# Altium PCB boost_converter.PcbDoc
Units mil, origin at the board's own origin, x right, y up, seen from the top; angles counter-clockwise.
Board outline 4000 x 3000 mil, 2 copper layers (Top Layer, Bottom Layer); 67 components, 32 nets, 157 pads, 0 vias.
Unrouted connection lines stored in the file: 1.
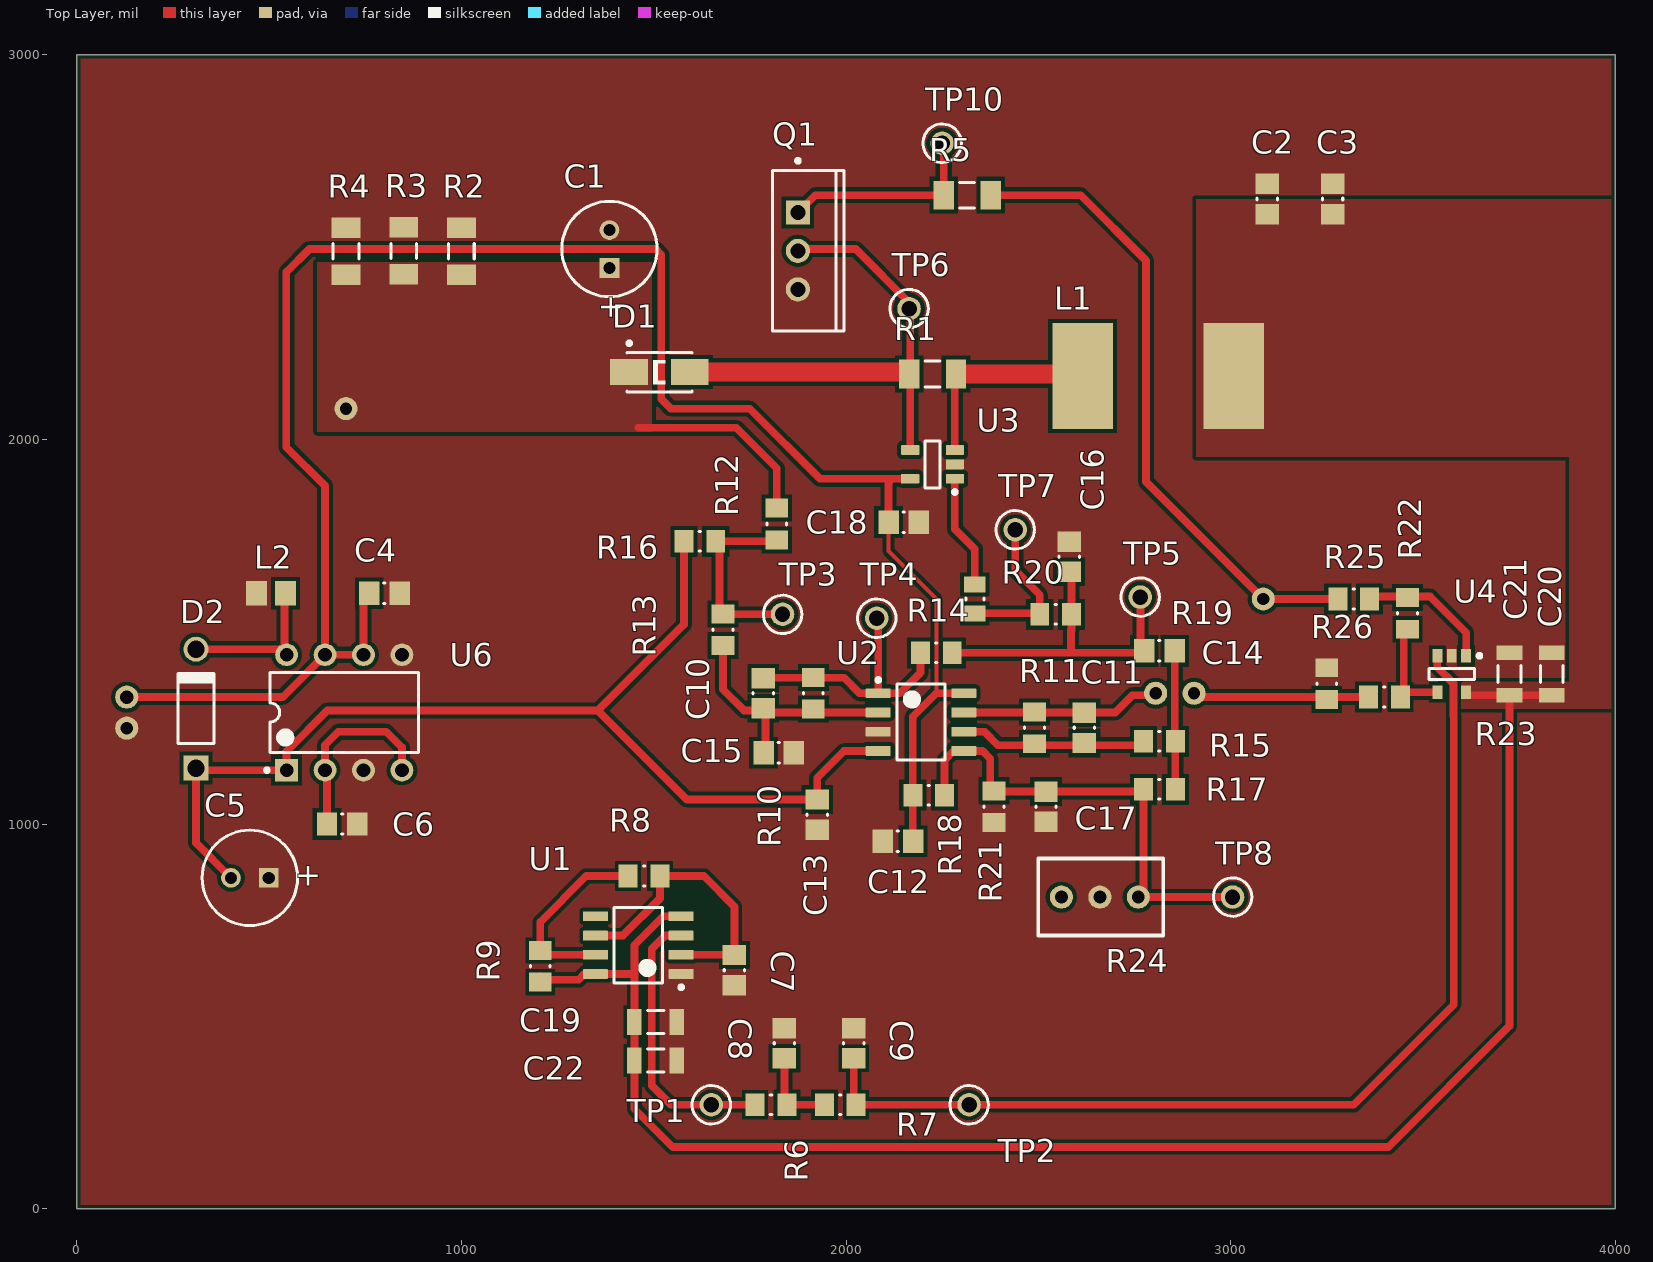
[diagram p0: Top Layer view]
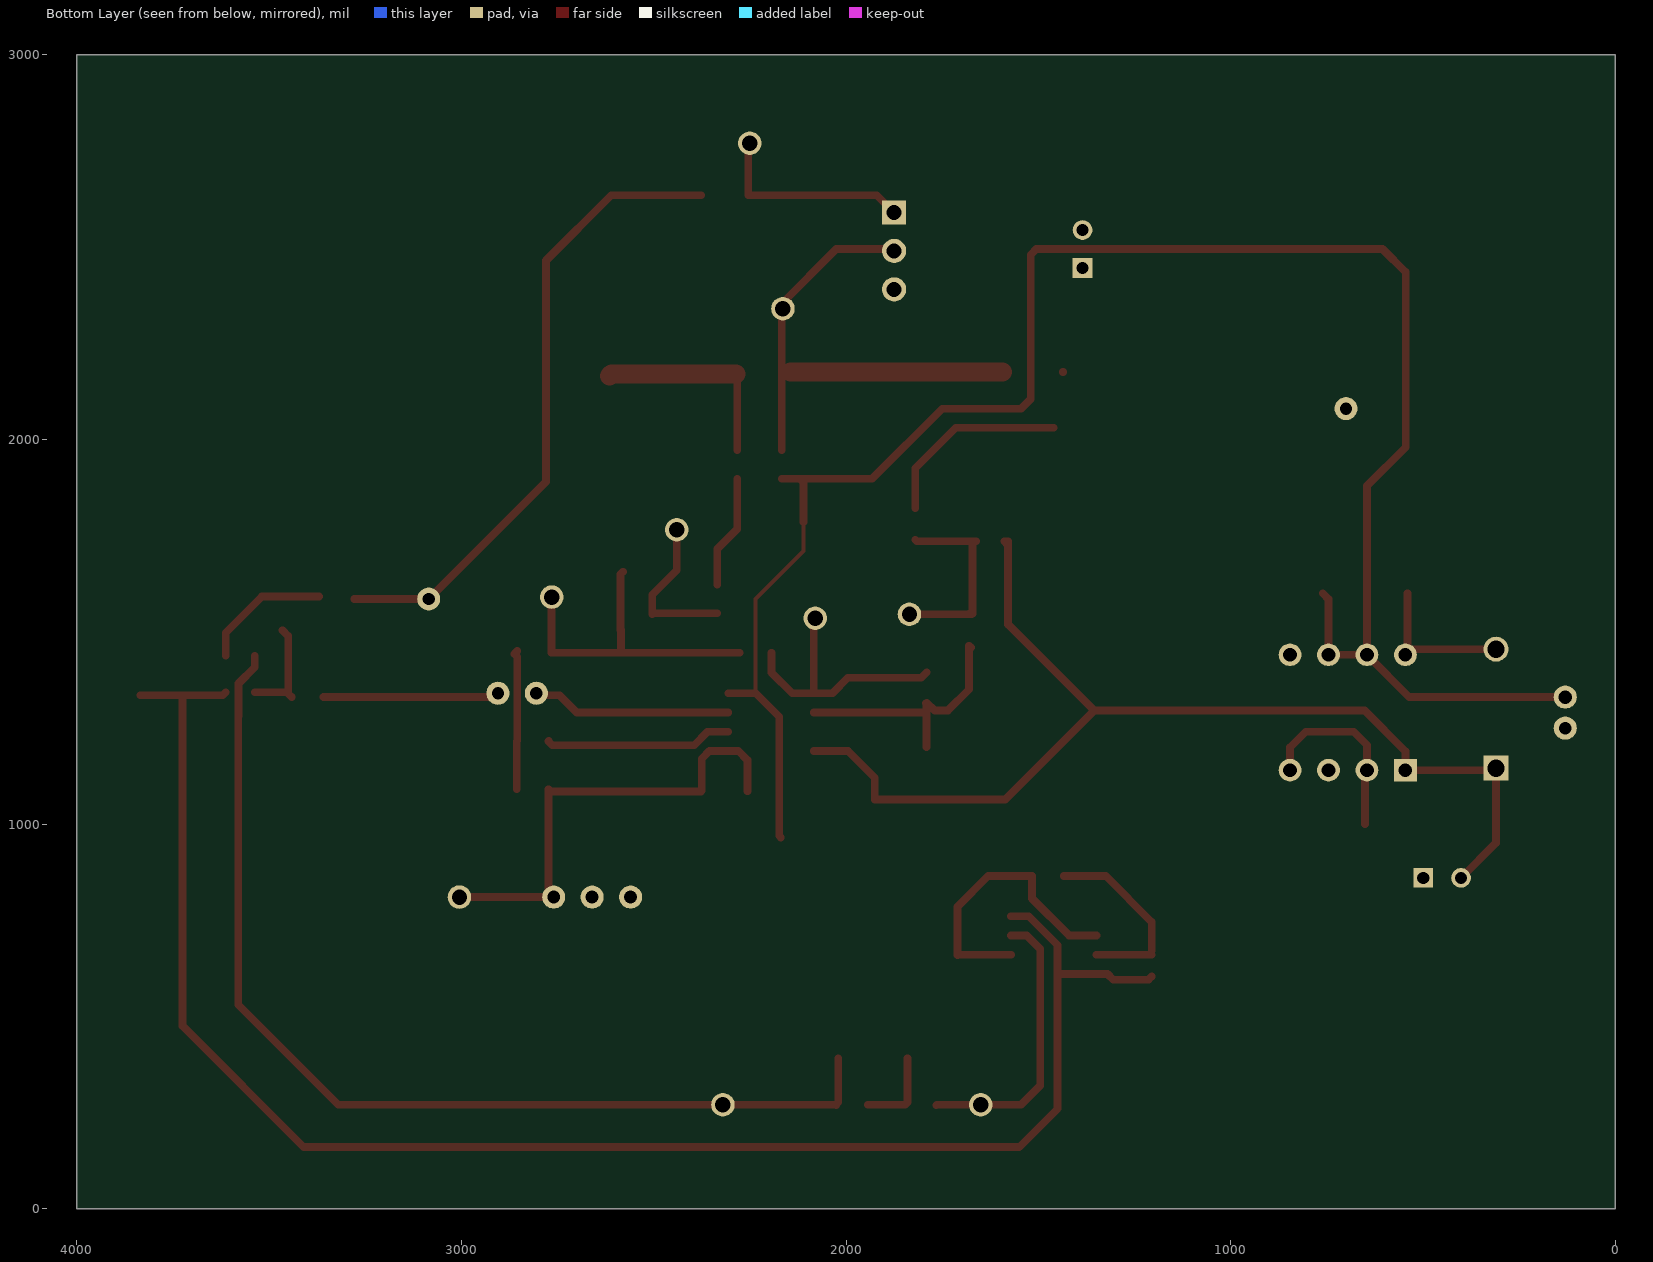
[diagram p1: Bottom Layer view, seen from below]

## Layer stack, top to bottom
Top Solder: solder mask 0.4, Solder Resist, Dk 3.5
Top Layer: signal copper 1.4
Dielectric 1: dielectric 12.6, FR-4, Dk 4.8
Bottom Layer: signal copper 1.4
Bottom Solder: solder mask 0.4, Solder Resist, Dk 3.5

## Board outline
0,0 0,3000 4000,3000 4000,0

## Design rules (kind name [scope] priority, off if disabled: settings)
AcuteAngle [All] p1: minimum=6.00000000000000E+0001 checktracksonly=FALSE
BoardOutlineClearance [All] p1: gap=10 except(0: Arc-SplitContinuation Track-SplitContinuation SMDPad-SplitContinuation THPad-SplitContinuation Via-SplitContinuation Fill-SplitContinuation Poly-SplitContinuation Region-SplitContinuation Text-SplitContinuation)
Clearance [All] p1: gap=10
PolygonConnect [All] p1: connectstyle=Direct reliefconductorwidth=10 reliefentries=4 polygonreliefangle="90 Angle" airgapwidth=10
RoutingVias [All] p1: holewidth=28 width=50 viastyle="Through Hole" minholewidth=28 minwidth=50 maxholewidth=28 maxwidth=50
SolderMaskExpansion [All] p1: expansion=4
Width [All] p1: maxlimit=50 minlimit=10 preferedwidth=20 bottomlayer_maxwidth=10 bottomlayer_prefwidth=10 minimp=50.000000 maximp=50.000000 favimp=50.000000
30 further rules are at their usual default settings.

## Classes and differential pairs
component class Boost_converter: C1 C2 C3 D1 L1 Q1 R1 R2 R3 R4 R5 TP6 TP10
component class Power: C4 C5 C6 D2 L2 U6
component class Signal_generator: C7 C8 C9 C19 C22 R6 R7 R8 R9 TP1 TP2 U1
component class State_feedback: C10 C11 C12 C13 C14 C15 C16 C17 C18 C20 C21 R10 R11 R12 R13 R14 R15 R16 R17 R18 R19 R20 R21 R22 R23 R24 R25 R26 TP3 TP4 TP5 TP7 TP8 U2 U3 U4

## Components (designator, comment, footprint, x,y, rotation, side; value= is the part's Value field where it differs from the comment)
C1 "ECA1HM470" CAPPR55-250-1120X630X1220 1385,2495 r90 top
C2 "CAP 0.5pF 50V 0805(2012)" CAPC0805(2012)75_M 3095,2625 r270 top
C3 "CAP 0.5pF 50V 0805(2012)" CAPC0805(2012)75_M 3265,2625 r270 top
C4 "50 nF" CAPC0805(2012)75_M 800,1600 r0 top
C5 "ECA1HM470" CAPPR55-250-1120X630X1220 450,860 r180 top
C6 "50 nF" CAPC0805(2012)75_M 690,1000 r0 top
C7 "50 nF" CAPC0805(2012)75_M 1710,620 r90 top
C8 "50 nF" CAPC0805(2012)75_M 1840,430 r90 top
C9 "50 nF" CAPC0805(2012)75_M 2020,430 r90 top
C10 "50 nF" CAPC0805(2012)75_M 1785,1340 r90 top
C11 "50 nF" CAPC0805(2012)75_M 2620,1250 r90 top
C12 "50 nF" CAPC0805(2012)75_M 2135,955 r180 top
C13 "50 nF" CAPC0805(2012)75_M 1925,1024.37 r90 top
C14 "50 nF" CAPC0805(2012)75_M 2815,1450 r0 top
C15 "50 nF" CAPC0805(2012)75_M 1825,1185 r0 top
C16 "50 nF" CAPC0805(2012)75_M 2580,1695 r270 top
C17 "50 nF" CAPC0805(2012)75_M 2520,1045 r90 top
C18 "50 nF" CAPC0805(2012)75_M 2150,1785 r0 top
C19 "CAP1206" CAPC1206(3216)150_L 1505,485 r180 top
C20 "CAP1206" CAPC1206(3216)150_L 3835,1390 r270 top
C21 "CAP1206" CAPC1206(3216)150_L 3725,1390 r270 top
C22 "CAP1206" CAPC1206(3216)150_L 1505,385 r180 top
D1 "" DIOD-S1M-13-F-SMA-2_V 1515,2175 r180 top
D2 "1N5817-T" DIOD-DO-41-P-2 310,1300 r90 top
L1 "BOUR-IND-2A" "SRR1208 Inductor" 2615,2165 r0 top
L2 "LQM21FN100M70L" MURA-IND0805_M 505,1600 r0 top
Q1 "IRF520NPBF" INTR-TO-220AB-3 1875,2490 r0 top
R1 "1K43 1% 1206(3216)" RESC1206(3216)_M 2225,2170 r0 top
R2 "1K43 1% 1206(3216)" RESC1206(3216)_M 1000,2488.98 r270 top
R3 "1K43 1% 1206(3216)" RESC1206(3216)_M 850,2490 r270 top
R4 "1K43 1% 1206(3216)" RESC1206(3216)_M 700,2488.98 r270 top
R5 "1K43 1% 1206(3216)" RESC1206(3216)_M 2315,2635 r0 top
R6 "? Ohm" RESC0805(2012)_M 1805,270 r0 top
R7 "? Ohm" RESC0805(2012)_M 1985,270 r0 top
R8 "? Ohm" RESC0805(2012)_M 1475,865 r180 top
R9 "? Ohm" RESC0805(2012)_M 1205,630 r270 top
R10 "? Ohm" RESC0805(2012)_M 1915,1340 r90 top
R11 "? Ohm" RESC0805(2012)_M 2490,1250 r90 top
R12 "? Ohm" RESC0805(2012)_M 1820,1780 r270 top
R13 "? Ohm" RESC0805(2012)_M 1680,1505 r270 top
R14 "? Ohm" RESC0805(2012)_M 2235,1445 r0 top
R15 "? Ohm" RESC0805(2012)_M 2815,1215 r180 top
R16 "? Ohm" RESC0805(2012)_M 1620,1735 r0 top
R17 "? Ohm" RESC0805(2012)_M 2815,1090 r0 top
R18 "? Ohm" RESC0805(2012)_M 2215,1075 r180 top
R19 "? Ohm" RESC0805(2012)_M 2545,1545 r0 top
R20 "Jumper 0805(2012)" RESC0805(2012)_N 2335,1585 r270 top
R21 "? Ohm" RESC0805(2012)_M 2385,1045 r90 top
R22 "? Ohm" RESC0805(2012)_M 3460,1547.6 r90 top
R23 "? Ohm" RESC0805(2012)_M 3400,1330 r0 top
R24 "5Mohm Potentiometer" 5k_pot 2760,810 r180 top
R25 "? Ohm" RESC0805(2012)_M 3320,1585 r180 top
R26 "? Ohm" RESC0805(2012)_M 3250,1365 r270 top
TP1 "5001" KSTN-5001 1650,270 r0 top
TP2 "5001" KSTN-5001 2320,270 r0 top
TP3 "5001" KSTN-5001 1835,1545 r0 top
TP4 "5001" KSTN-5001 2080,1535 r0 top
TP5 "5001" KSTN-5001 2765,1590 r0 top
TP6 "5001" KSTN-5001 2163.98,2340 r0 top
TP7 "5001" KSTN-5001 2440,1765 r0 top
TP8 "5001" KSTN-5001 3005,810 r0 top
TP10 "5001" KSTN-5001 2250,2770 r90 top
U1 "NE555DR" D0008A_M 1460,685 r180 top
U2 "OPA2137UA" D0008A_M 2195,1265 r0 top
U3 "INA193AIDBVR" DBV0005A_M 2225,1935 r180 top
U4 "LM7321MF" MF05A_L 3575,1390 r270 top
U6 "MAX764CPA+-ND" PDIP300-P8 695.47,1290 r90 top

## Footprints (in the part's own frame and the unit in brackets; to place one, negate y for a bottom-side part, rotate by r counter-clockwise, add the part's x,y. Pads: shape width x height; smd on the part's side, far side on the other; paste and mask are expansions set on the pad)
5k_pot [mil] "3296W-1-505LF"
  round 60 hole 33.46: 1(0,0) 2(100,0) 3(200,0)
  silkscreen extent -65,-100 260,100
CAPC0805(2012)75_M [mm] "Chip Capacitor, Body 2.0x1.2mm, Height 0.75mm, IPC Low Density"
  rect 1.35x1.55 smd: 1(-1,0) 2(1,0)
  silkscreen extent -0.05,-0.67 0.05,0.67, body extent -1.1,-0.72 1.1,0.72, height 0.75
CAPC1206(3216)150_L [mm]
  rect 0.95x1.7 smd: 1(-1.4,0) 2(1.4,0)
  silkscreen extent -0.55,-0.75 0.55,0.75, body extent -1.7,-0.9 1.7,0.9, height 1.5
CAPPR55-250-1120X630X1220 [mm] "THD, 2-Leads, Dia 6.3mm, Body Length 11.2mm"
  rect 1.3x1.3 hole 0.8: 1(-1.25,0)
  round 1.3 hole 0.8: 2(1.25,0)
  silkscreen extent -3.15,-3.15 3.15,3.15, body extent -3.15,-3.15 3.16,3.15, height 12.21
D0008A_M [mm] "SOIC, 8-Leads, Body 5x4mm, Pitch 1.27mm, IPC Low Density"
  rrect15% 1.65x0.65 smd: 1(-2.825,1.905) 2(-2.825,0.635) 3(-2.825,-0.635) 4(-2.825,-1.905) 5(2.825,-1.905) 6(2.825,-0.635) 7(2.825,0.635) 8(2.825,1.905)
  silkscreen extent -2.95,-2.5 1.6,2.9, body extent -3,-2.45 3,2.45, height 1.63
DBV0005A_M [mm] "SOT23, 5-Leads, Body 3.05x1.75mm, Pitch 0.95mm, IPC Low Density"
  rrect15% 1.2x0.65 smd: 1(-1.475,0.95) 2(-1.475,0) 3(-1.475,-0.95) 4(1.475,-0.95) 5(1.475,0.95)
  silkscreen extent -1.6,-1.55 0.5,1.95, body extent -1.42,-1.46 1.42,1.46, height 1.08
DIOD-DO-41-P-2 [mm] "THD, 2-Leads, Body 4.635x2.36mm, Pin Spacing 7.85mm"
  rect 1.65x1.65 hole 1.15: 1(-3.925,0)
  round 1.65 hole 1.15: 2(3.925,0)
  silkscreen extent -2.32,-1.18 2.32,1.18, body extent -4.36,-1.18 4.36,1.18, height 2.35
DIOD-S1M-13-F-SMA-2_V [mm] "SMD, 2-Leads, Body 4.3x2.605mm, Height 2.3mm"
  rect 2.5x1.7 smd: 1(-2,0) 2(2,0)
  silkscreen extent -2.15,-2.03 2.15,1.3, body extent -2.15,-1.3 2.15,1.3, height 2.3
INTR-TO-220AB-3 [mm] "FM, 3-Leads, Body 10.55x4.7mm, Pitch 2.54mm"
  rect 1.6x1.6 hole 1: 1(0,2.54)
  round 1.6 hole 1: 2(0,0) 3(0,-2.54)
  silkscreen extent -1.67,-5.3 3.03,6.07, body extent -1.67,-5.28 3.03,5.28, height 19.3
KSTN-5001 [mm] "Test Point, Through Hole, Dia 2.54mm"
  round 1.55 hole 1.016: 1(0,0)
  silkscreen extent -1.27,-1.27 1.27,1.27, body extent -1.25,-1.25 1.25,1.25, height 4.62
MF05A_L [mm] "SOT23, 5-Leads, Body 2.9x1.6mm, Pitch 0.95mm, Lead Span 2.8mm, IPC High Density"
  rect 0.9x0.65 smd: 1(-1.2,0.95) 2(-1.2,0) 3(-1.2,-0.95) 4(1.2,-0.95) 5(1.2,0.95)
  silkscreen extent -1.32,-1.5 0.35,1.95, body extent -0.83,-1.49 0.83,1.5, height 1.19
MURA-IND0805_M [mm] "Chip Inductor, 2-Leads, Body 2.2x1.45mm, IPC Low Density"
  rect 1.39x1.59 smd: 1(-0.955,0) 2(0.955,0)
  body extent -1.1,-0.72 1.1,0.72, height 1.45
PDIP300-P8 [mm] "8-Pin Plastic Dual In-Line Package (PDIP)"
  rect 1.5x1.5 hole 0.9: 1(-3.81,3.81)
  round 1.5 hole 0.9: 2(-3.81,1.27) 3(-3.81,-1.27) 4(-3.81,-3.81) 5(3.81,-3.81) 6(3.81,-1.27) 7(3.81,1.27) 8(3.81,3.81)
  silkscreen extent -3.93,-4.9 2.65,5.23, body extent -3.55,-4.9 3.55,4.9, height 4.32
RESC0805(2012)_M [mm] "Chip Resistor, Body 2.0x1.3mm, IPC Low Density"
  rect 1.25x1.5 smd: 1(-1.05,0) 2(1.05,0)
  silkscreen extent -0.05,-0.65 0.05,0.65, body extent -1.1,-0.67 1.1,0.67, height 0.7
RESC0805(2012)_N [mm] "Chip Resistor, Body 2.0x1.3mm, IPC Medium Density"
  rect 1.05x1.4 smd: 1(-0.95,0) 2(0.95,0)
  silkscreen extent -0.05,-0.6 0.05,0.6, body extent -1.1,-0.67 1.1,0.68, height 0.7
RESC1206(3216)_M [mm] "Chip Resistor, Body 3.2x1.6mm, IPC Low Density"
  rect 1.35x1.9 smd: 1(-1.55,0) 2(1.55,0)
  silkscreen extent -0.5,-0.85 0.5,0.85, body extent -1.67,-0.87 1.67,0.87, height 0.75
"SRR1208 Inductor" [mm]
  rect 4x7 smd: 1(10,0) 2(0,0)
  body extent -1.27,-6.35 11.43,6.35, height 8.4

## Part data
C1 C5: library part CMP-2100-03626-1, "Aluminum Electrolytic Capacitor, 47 uF, +/- 20%, 50 V, -40 to 85 degC, 2-Pin THD, RoHS, Bulk"
C2 C3 C4 C6 C7 C8 C9 C10 C11 C12 C13 C14 C15 C16 C17 C18: library part CMP-1036-00018-1, "CAP 0.5pF 50V ±0.1pF 0805 (2012 Metric) Thickness 0.75mm SMD"
C19 C20 C21 C22: library part CMP-1590-00001-1, "1206 (3216 Metric) Chip Capacitor"
D1: library part CMP-0639-00001-1, "Surface Mount Glass Passivated Rectifier, 1000V, 1 A, -65 to 125 degC, 2-Pin SMA Package, RoHS, Tape and Reel"
D2: library part CMP-2000-05521-1, "Schottky Barrier Rectifier, 1 A, 20 V, -65 to 125 degC, 2-Pin DO-41, RoHS, Tape and Reel"
L2: library part CMP-2000-06587-1, "Fixed Inductor, 10 uH, +/-20%, -55 to 125 degC, 2-Pin SMD (0805), RoHS, Tape and Reel"
Q1: library part CMP-2100-03647-1, "HEXFET(R) Power MOSFET, 100 V, 9.7 A, 0.2 Ohm, -55 to 175 degC, 3-Pin FM (TO-220AB), RoHS, Tube"
R1 R2 R3 R4 R5: library part CMP-1014-00526-1, "1K43 0.25W 1% 1206 (3216 Metric)  SMD"
R6 R7 R8 R9 R10 R11 R12 R13 R14 R15 R16 R17 R18 R19 R21 R22 R23 R25 R26: library part CMP-1013-00017-1, "4R3 0.125W 5% 0805 (2012 Metric)  SMD"
R20: library part CMP-1013-00001-1, "Jumper 0805 (2012 Metric)"
R24: "3296W-1-505LF"
TP1 TP2 TP3 TP4 TP5 TP6 TP7 TP8 TP10: library part CMP-2000-05181-1, "Test Point, Black, 1-Pin THD, RoHS, Bulk"
U1: library part CMP-1685-00007-1, "Precision Timer, 4.5 to 16 V, 0 to 70 degC, 8-Pin SOIC (D8), Green (RoHS & no Sb/Br), Tape and Reel"
U2: library part CMP-0017-00406-2, "Low Cost FET-Input Operational Amplifier, 4.5 to 36 V, -40 to 85 degC, 8-pin SOIC (D8), Green (RoHS & no Sb/Br)"
U3: library part CMP-0704-00029-2, "Voltage Output High-Side Measurement Current Shunt Monitor, 2.7 to 18 V, -40 to 125 degC, 5-pin SOT23 (DBV5), Green (RoHS & no Sb/Br)"
U4: library part CMP-0055-01343-2, "Rail-to-Rail Input/Output, ±15V, High Output Current and Unlimited Capacitive Load Operational Amplifier, 5-pin SOT-23"
U6: "IC REG BUCK BST INV ADJ/-5V 8DIP"

## Free pads (board coordinates)
  round 60 hole 35: 4(130,1330)
  round 60 hole 32: 5(130,1249.29) 8(2805,1340) 9(2905,1340) 10(3085,1585) 11(700,2080)

## Nets (pads, with @x,y where several pads share a name; then routed paths per layer and width w, separated by ;. In a path a pad name is that pad's centre, name@x,y a point inside that pad or via, vN(x,y) a via of type N, cw(c..) or ccw(c..) an arc to the next point about the centre after c; other vN are vias at no path point)
5V: C2.2 C3.2 C19.2 C20.2 C21.2 C22.2 L1.1 R9.2 U1.4 U1.8 U4.5 | length 4364.7
  Top Layer w20: R9.2@1205,603.66 1213.66,595 1305,595 1320,610 U1.8 1449.88,610 ; U1.4 1525,760 1449.88,684.88 1449.88,610 ; U4.5 3620.28,1334.88 C21.2 ; C20.2 C21.2 ; 1449.88,610 C19.2 C22.2 1449.88,260.12 1550,160 3410,160 3725,475 C21.2
15V: C4.1 C12.1 C18.1 pad.4 R18.2 U2.8 U3.5 U6.6 U6.7 | length 5064.2
  Top Layer w10: C18.1 2110.63,1709.37 2235,1585 2235,1340
  Top Layer w20: pad.4 535.47,1330 U6.7 ; C4.1 745.47,1584.84 U6.6 U6.7 ; C18.1 2110.63,1888.23 2120,1897.6 ; U3.5 2120,1897.6 ; C12.1@2169.37,965 2173.66,969.29 R18.2 2173.66,1278.66 2235,1340 U2.8 ; U6.7 645.47,1879.53 545,1980 545,2435 605,2495 1505,2495 1520,2480 1520,2105 1545,2080 1750,2080 1932.4,1897.6 2120,1897.6
-15V: C5.2 C13.2 D2.1 R16.1 U2.4 U6.1 | length 2928.3
  Top Layer w20: C5.2 310,950.79 D2.1 315.47,1140 U6.1 545.47,1189.53 650.94,1295 1355,1295 ; R16.1@1580,1726.34 1588.66,1735 R16.1 1578.66,1518.66 1355,1295 ; U2.4 1995,1190 1925,1120 C13.2 1586.26,1063.74 1355,1295
-KIL_DELTA: R19.1 R20.2 TP7.1 | length 416.1
  Top Layer w20: R20.2 2501.06,1547.6 R19.1 2503.66,1596.34 2440,1660 TP7.1
-KVC_DELTA: C10.2 R10.2 R14.1 TP4.1 U2.1 | length 696.3
  Top Layer w20: C10.2@1790,1394.37 1804.37,1380 1995,1380 2035,1340 U2.1 ; TP4.1 2083.78,1531.22 U2.1 ; R14.1 2193.66,1393.66 2140,1340 U2.1
D_IN: pad.10 R25.2 | length 1674.4
  Top Layer w20: 2376.02,2635 2610,2635 2780,2465 2780,1890 pad.10 R25.2
FB: C6.1 U6.2 U6.4 | length 498.6
  Top Layer w20: C6.1 650.63,1134.84 U6.2 645.47,1204.53 645,1205 680,1240 805,1240 845.47,1199.53 U6.4
GND: C1.2 C2.1 C3.1 C4.2 C5.1 C6.2 C7.1 C8.2 C9.2 C12.2 C13.1 C15.2 C16.1 C17.1 C18.2 C19.1 C20.1 C21.1 C22.1 L2.1 pad.5 Q1.3 R2.1 R3.1 R4.1 R21.1 R24.2 R26.1 U1.1 U2.3 U3.2 U4.2 U6.3 U6.5
NetC7_2: C7.2 R8.1 U1.2 U1.6 | length 757.6
  Top Layer w20: U1.6 1420,710 1516.34,806.34 R8.1 1630,865 1710,785 C7.2 1709.37,660 U1.2
NetC8_1: C8.1 R6.2 R7.1 | length 220.6
  Top Layer w20: C8.1 1840,276.34 R6.2 R7.1
NetC9_1: C9.1 R7.2 TP2.1 | length 2712.7
  Top Layer w20: C9.1 2020,276.34 R7.2 ; R7.2@2025,270 2025,268.66 R7.2 ; 3537.6,1437.24 3537.6,1407.4 3579.61,1365.39 3579.61,1280.39 3580,1280 3580,530 3320,270 TP2.1 R7.2
NetC10_1: C10.1 C15.1 R10.1 R13.2 U2.2 | length 682.2
  Top Layer w20: R13.2@1675,1458.66 R13.2 1680,1350 1735,1295 1769.37,1295 1790,1315.63 1791.97,1313.66 1790.63,1312.32 C10.1@1790.63,1295 ; C10.1 C10.1@1790.63,1295 ; C15.1@1790.63,1200 C10.1@1790.63,1295 ; U2.2 1795.63,1290 C10.1@1790.63,1295
NetC11_1: C11.1 R11.1 R15.2 U2.6 | length 487
  Top Layer w20: U2.6 2360,1240 2395,1205 2763.66,1205 R15.2 R15.2@2773.03,1215.63
NetC14_1: C14.1 C16.2 R14.2 R19.2 TP5.1 | length 851
  Top Layer w20: R14.2 2585,1445 ; C16.2 2586.34,1649.29 R19.2 2586.34,1503.66 2585,1505 2585,1445 ; TP5.1 2765.63,1589.37 2765.63,1445 2585,1445
NetC14_2: C14.2 R15.1 R17.2 | length 366.7
  Top Layer w20: C14.2 2862.14,1442.23 2855,1435.08 2855,1216.34 R15.1 R17.2
NetD1_1: D1.1 Q1.2 R1.1 TP6.1 | length 1296.9
  Top Layer w20: Q1.2 1880,2495 2025,2495 2168.31,2351.69 2169.05,2351.36 2179.24,2346.81 2174.17,2335.45 2166.93,2319.22 R1.1@2166.93,2170 ; R1.1 R1.1@2166.93,2170 ; 2166.93,1972.4 R1.1@2166.93,2170
  Top Layer w50: D1.1 R1.1@2143.98,2175
NetD2_2: D2.2 L2.2 U6.8 | length 396.3
  Top Layer w20: D2.2 530.94,1454.53 U6.8@540,1445.47 ; L2.2@540,1600.28 U6.8@540,1445.47 ; U6.8 U6.8@540,1445.47
NetL1_2: L1.2 R1.2 | length 544
  Top Layer w20: 2283.07,1972.4 2283.07,2167.05 R1.2 ; L1.2@2605,2155 L1.2
  Top Layer w50: R1.2 2610,2170 L1.2
NetQ1_1: Q1.1 R5.1 TP10.1 | length 533
  Top Layer w20: Q1.1 1920,2635 R5.1 2253.98,2768.98 TP10.1@2255,2770
NetR5_2: R5.2
NetR6_1: R6.1 TP1.1 U1.3 | length 737
  Top Layer w20: U1.3 1530,710 1495,675 1495,320 1545,270 TP1.1 R6.1 R6.1@1765,268.66
NetR8_2: R8.2 R9.1 U1.7 | length 495.8
  Top Layer w20: R9.1@1205,660 U1.7 ; R9.1 1205,745 1325,865 R8.2
NetR20_1: R20.1 U3.1 | length 296.7
  Top Layer w20: U3.1 2283.07,1766.93 2335,1715 R20.1
NetR22_1: R22.1 R23.2 U4.4 | length 272.8
  Top Layer w20: R23.2 R23.2@3450,1338.66 ; R22.1@3465,1503.66 3450,1488.66 R23.2@3450,1338.66 ; U4.4 3454.09,1342.76 R23.2@3450,1338.66
NetR22_2: R22.2 R25.1 U4.1 | length 341.6
  Top Layer w20: R25.1@3370,1591.34 3518.66,1591.34 3612.4,1497.6 U4.1
SAW_REF: U4.3
SHUNT_POS: U3.3
SUM: C11.2 pad.8 pad.9 R11.2 R23.1 R26.2 U2.7 | length 977.3
  Top Layer w20: U2.7 2700,1290 2745,1335 2800,1335 pad.8 ; pad.9 2915,1330 R23.1
SW: U3.4
VC_DELTA: R12.2 R13.1 R16.2 TP3.1 | length 521.7
  Top Layer w20: R16.2 R16.2@1671.34,1735 ; R13.1 R13.1@1671.34,1546.34 ; R12.2 1816.34,1735 R16.2@1671.34,1735 ; TP3.1 1672.68,1545 R13.1@1671.34,1546.34 ; R13.1@1671.34,1546.34 R16.2@1671.34,1735
VCM: C17.2 R17.1 R18.1 R21.2 R24.1 TP8.1 U2.5 | length 1234.2
  Top Layer w20: R18.1@2256.34,1085 2256.34,1166.34 2280,1190 U2.5 2355,1190 2375,1170 2375,1086.34 2376.97,1084.37 C17.2 2768.03,1084.37 R17.1 2773.66,823.66 R24.1 TP8.1
VOUT: C1.1 D1.2 pad.11 R2.2 R3.2 R4.2 R12.1 | length 508.4
  Top Layer w20: D1.2@1435,2175 D1.2 ; 1460,2030 1715,2030 1820,1925 R12.1
pads on no net: R24.3 U1.5

## Polygon pours and split planes (outlines as drawn)
5V on Top Layer "5v_2" (solid, pour order 14): 3590,1370 3880,1370 3880,1990 4070,1990 4070,1300 3590,1300
VOUT on Top Layer "vout" (solid, pour order 8): 625,2460 1495,2460 1495,2020 625,2020
5V on Top Layer "VIN" (solid, pour order 10): 2910,1955 2910,2625 3355,2625 5235,2625 5235,1955
GND on Top Layer "ground" (solid, remove dead copper, pour order 12): -315,4405 6295,4405 6295,2470 6295,-355 -310,-355

## Silkscreen, mask and mechanical layers (free items; w line width, h text height)
Mechanical 1:
  the board outline again, w10
Drill Drawing:
  circle w10: c70.62,4705.83 r20
  circle w10: c70.62,4705.83 r33.33
  circle w10: c70.62,3805.83 r33.33
  lines w10: 37.29,3639.17 53.96,3639.17 53.96,3622.5 87.29,3622.5 87.29,3639.17 103.96,3639.17 103.96,3672.5 87.29,3672.5 87.29,3689.17 53.96,3689.17 53.96,3672.5 37.29,3672.5 37.29,3639.17 ; 37.29,3955.83 70.62,3922.5 103.96,3955.83 70.62,3989.17 37.29,3955.83 ; 37.29,4072.5 37.29,4089.17 53.96,4105.83 37.29,4122.5 37.29,4139.17 53.96,4139.17 70.62,4122.5 87.29,4139.17 103.96,4139.17 103.96,4122.5 87.29,4105.83 103.96,4089.17 103.96,4072.5 87.29,4072.5 70.62,4089.17 53.96,4072.5 37.29,4072.5 ; 37.29,4239.17 53.96,4239.17 70.62,4222.5 87.29,4239.17 103.96,4239.17 87.29,4255.83 103.96,4272.5 87.29,4272.5 70.62,4289.17 53.96,4272.5 37.29,4272.5 53.96,4255.83 37.29,4239.17 ; 37.29,4439.17 103.96,4439.17 70.62,4372.5 37.29,4439.17 ; 37.29,4522.5 70.62,4539.17 103.96,4522.5 87.29,4555.83 103.96,4589.17 70.62,4572.5 37.29,4589.17 53.96,4555.83 37.29,4522.5
  lines w15: -22.5,3577.5 10458.6,3577.5 ; -22.5,4777.5 10458.6,4777.5 ; 528.38,3427.5 528.38,4927.5 ; 1068.24,3427.5 1068.24,4927.5 ; 2167.92,3427.5 2167.92,4927.5 ; 2673.79,3427.5 2673.79,4927.5 ; 3407.59,3427.5 3407.59,4927.5 ; 4907.14,3427.5 4907.14,4927.5 ; 5496.99,3427.5 5496.99,4927.5 ; 6242.79,3427.5 6242.79,4927.5 ; 6892.62,3427.5 6892.62,4927.5 ; 7746.38,3427.5 7746.38,4927.5 ; 9079.99,3427.5 9079.99,4927.5 ; -22.5,3427.5 10458.6,3427.5 10458.6,4927.5 -22.5,4927.5 -22.5,3427.5
  text "Symbol" at 67.5,4822.5 h72
  text "Count" at 573.38,4822.5 h72
  text "Hole Size" at 1113.24,4822.5 h72
  text "Plated" at 2212.92,4822.5 h72
  text "Hole Type" at 2718.79,4822.5 h72
  text "Drill Layer Pair" at 3452.59,4822.5 h72
  text "Via/Pad" at 4952.14,4822.5 h72
  text "Pad Shape" at 5541.99,4822.5 h72
  text "Template" at 6287.79,4822.5 h72
  text "Description" at 6937.62,4822.5 h72
  text "Hole Tolerance (+)" at 7791.38,4822.5 h72
  text "Hole Tolerance (-)" at 9124.99,4822.5 h72
  text "1" at 573.38,4672.5 h60
  text "35.00mil (0.889mm)" at 1113.24,4672.5 h60
  text "PTH" at 2212.92,4672.5 h60
  text "Round" at 2718.79,4672.5 h60
  text "Top Layer - Bottom Layer" at 3452.59,4672.5 h60
  text "Pad" at 4952.14,4672.5 h60
  text "Rounded" at 5541.99,4672.5 h60
  text "c152h89" at 6287.79,4672.5 h60
  text "2" at 573.38,4522.5 h60
  text "45.28mil (1.150mm)" at 1113.24,4522.5 h60
  text "PTH" at 2212.92,4522.5 h60
  text "Round" at 2718.79,4522.5 h60
  text "Top Layer - Bottom Layer" at 3452.59,4522.5 h60
  text "Pad" at 4952.14,4522.5 h60
  text "(Mixed)" at 5541.99,4522.5 h60
  text "(Mixed)" at 6287.79,4522.5 h60
  text "3" at 573.38,4372.5 h60
  text "33.46mil (0.850mm)" at 1113.24,4372.5 h60
  text "PTH" at 2212.92,4372.5 h60
  text "Round" at 2718.79,4372.5 h60
  text "Top Layer - Bottom Layer" at 3452.59,4372.5 h60
  text "Pad" at 4952.14,4372.5 h60
  text "Rounded" at 5541.99,4372.5 h60
  text "c152h85" at 6287.79,4372.5 h60
  text "3" at 573.38,4222.5 h60
  text "39.37mil (1.000mm)" at 1113.24,4222.5 h60
  text "PTH" at 2212.92,4222.5 h60
  text "Round" at 2718.79,4222.5 h60
  text "Top Layer - Bottom Layer" at 3452.59,4222.5 h60
  text "Pad" at 4952.14,4222.5 h60
  text "(Mixed)" at 5541.99,4222.5 h60
  text "(Mixed)" at 6287.79,4222.5 h60
  text "4" at 573.38,4072.5 h60
  text "31.50mil (0.800mm)" at 1113.24,4072.5 h60
  text "PTH" at 2212.92,4072.5 h60
  text "Round" at 2718.79,4072.5 h60
  text "Top Layer - Bottom Layer" at 3452.59,4072.5 h60
  text "Pad" at 4952.14,4072.5 h60
  text "(Mixed)" at 5541.99,4072.5 h60
  text "(Mixed)" at 6287.79,4072.5 h60
  text "5" at 573.38,3922.5 h60
  text "32.00mil (0.813mm)" at 1113.24,3922.5 h60
  text "PTH" at 2212.92,3922.5 h60
  text "Round" at 2718.79,3922.5 h60
  text "Top Layer - Bottom Layer" at 3452.59,3922.5 h60
  text "Pad" at 4952.14,3922.5 h60
  text "Rounded" at 5541.99,3922.5 h60
  text "c152h81" at 6287.79,3922.5 h60
  text "8" at 573.38,3772.5 h60
  text "35.43mil (0.900mm)" at 1113.24,3772.5 h60
  text "PTH" at 2212.92,3772.5 h60
  text "Round" at 2718.79,3772.5 h60
  text "Top Layer - Bottom Layer" at 3452.59,3772.5 h60
  text "Pad" at 4952.14,3772.5 h60
  text "(Mixed)" at 5541.99,3772.5 h60
  text "(Mixed)" at 6287.79,3772.5 h60
  text "9" at 573.38,3622.5 h60
  text "40.00mil (1.016mm)" at 1113.24,3622.5 h60
  text "PTH" at 2212.92,3622.5 h60
  text "Round" at 2718.79,3622.5 h60
  text "Top Layer - Bottom Layer" at 3452.59,3622.5 h60
  text "Pad" at 4952.14,3622.5 h60
  text "Rounded" at 5541.99,3622.5 h60
  text "c155h102" at 6287.79,3622.5 h60
  text "35 Total" at 573.38,3472.5 h60

## Text inside footprints (layer, text, board x,y; h text height)
C1: Top Overlay "+" at 1414.53,2309.97 h59.06 r90
C5: Top Overlay "+" at 635.03,889.53 h59.06 r180